# Altium PCB dislay.PcbDoc
Units mil, origin at the board's own origin, x right, y up, seen from the top; angles counter-clockwise.
Board outline 4150 x 1675 mil, 2 copper layers (Top Layer, Bottom Layer); 57 components, 72 nets, 201 pads, 2 vias.
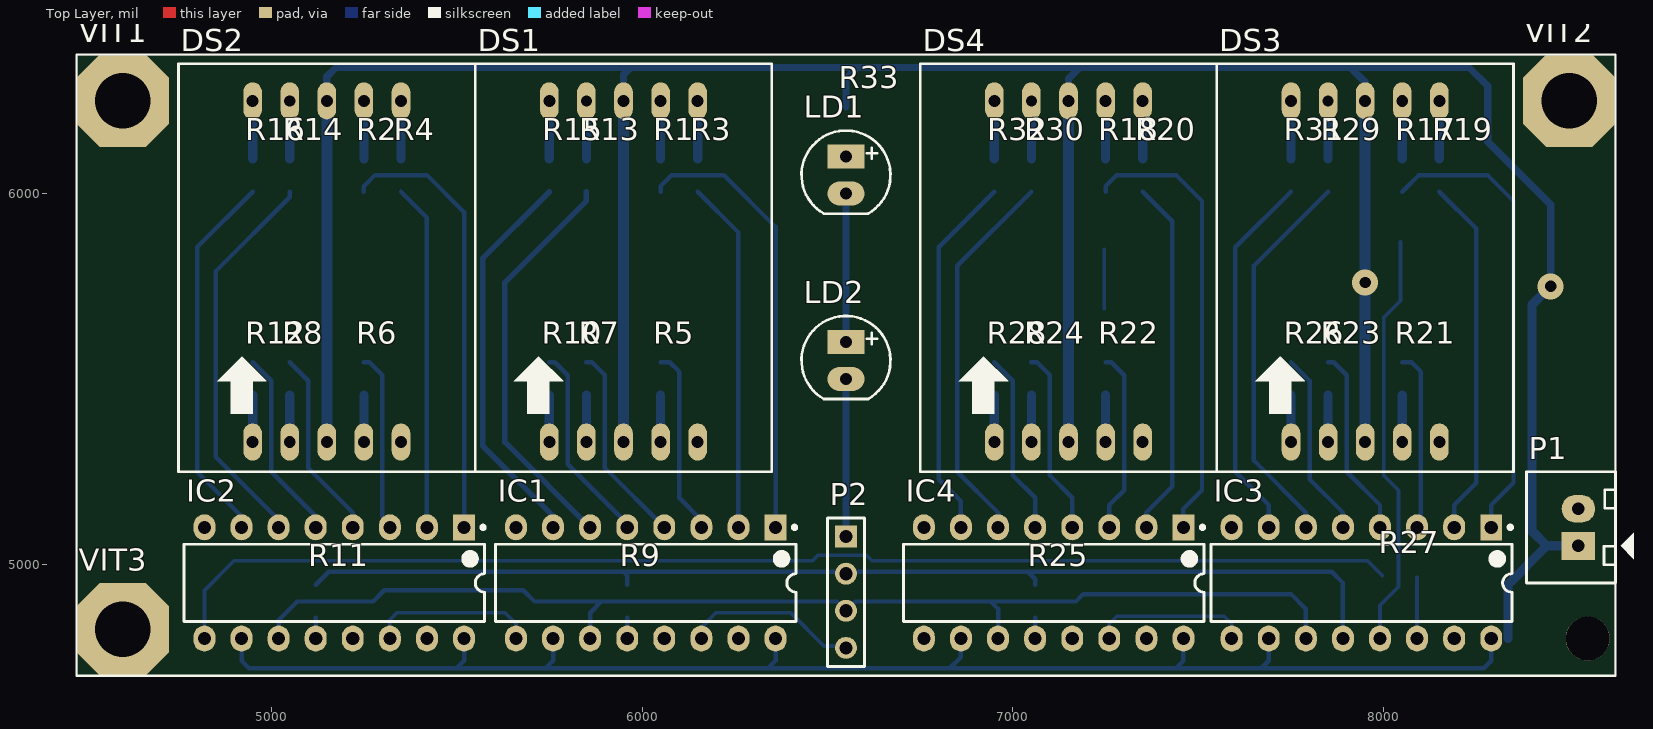
[diagram p0: Top Layer view]
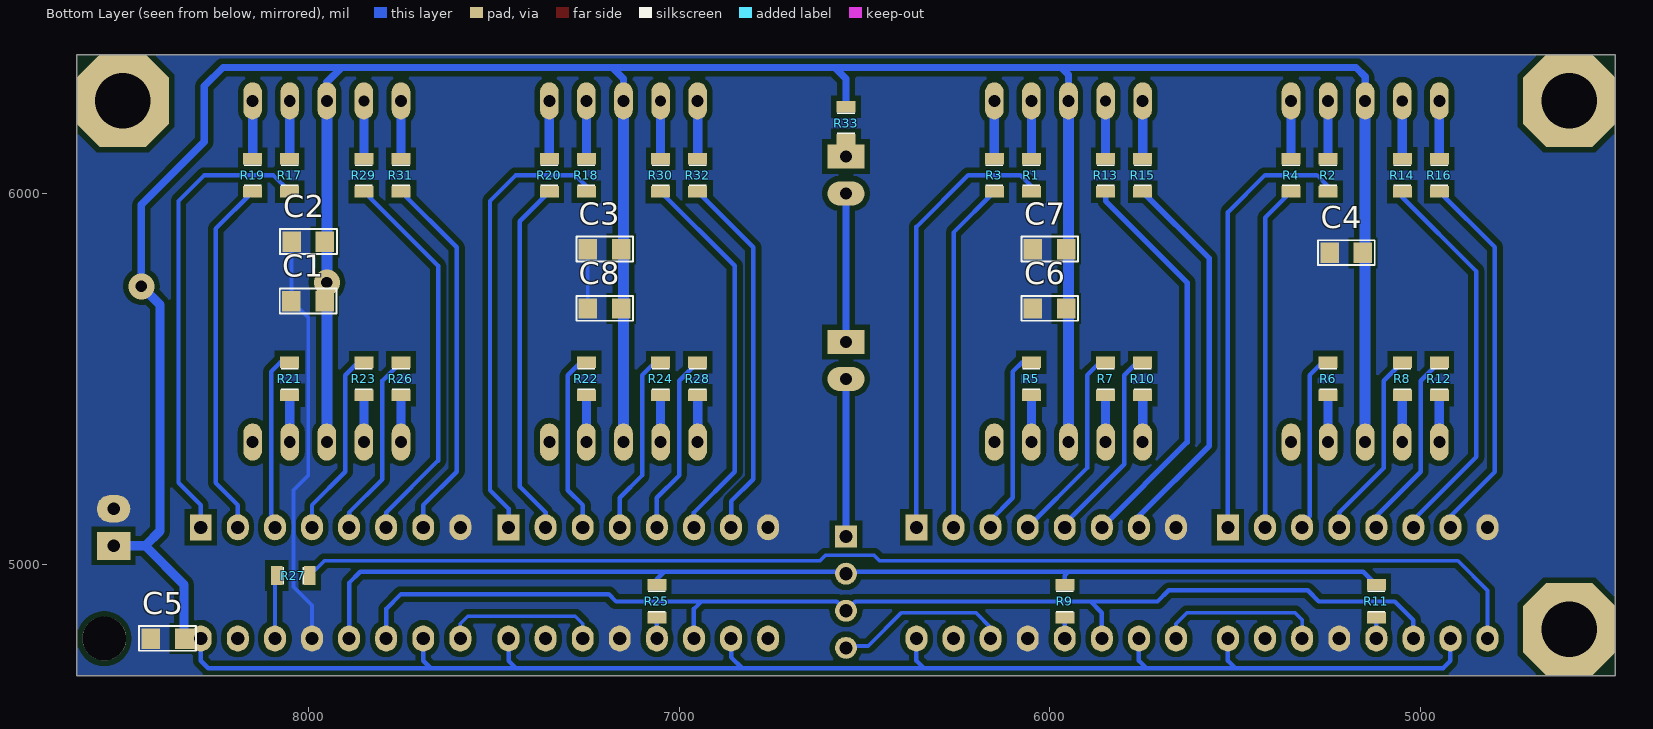
[diagram p1: Bottom Layer view, seen from below]
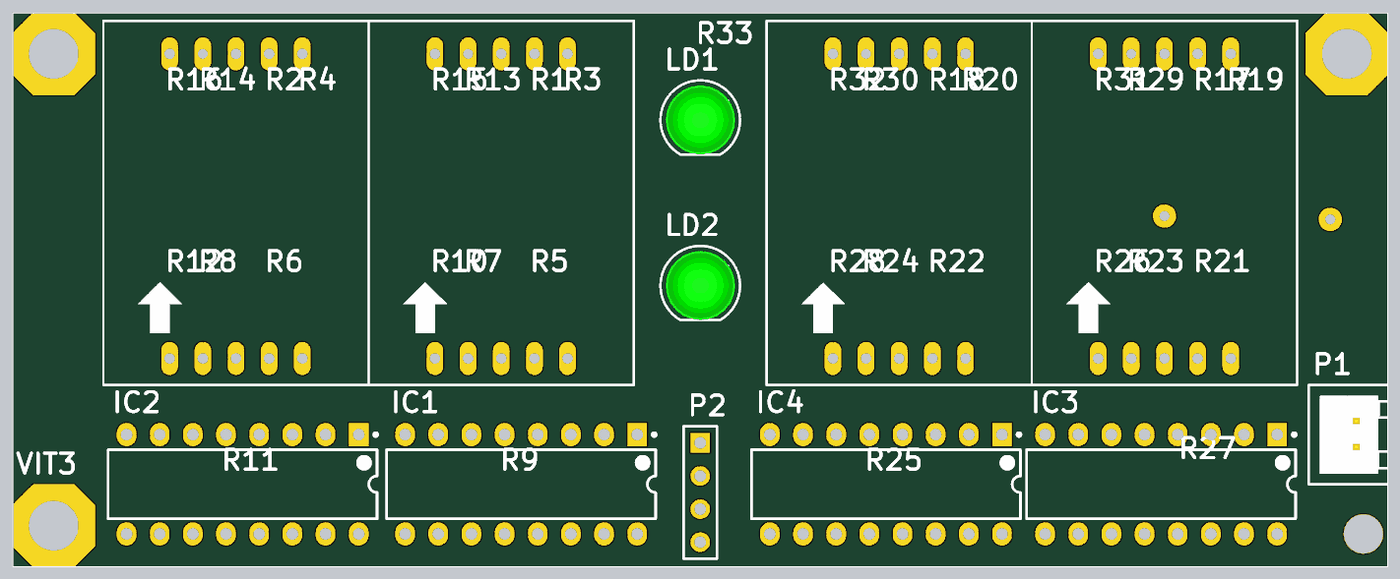
[diagram p2: 3D render of the assembled board from above, using the file's embedded part models]
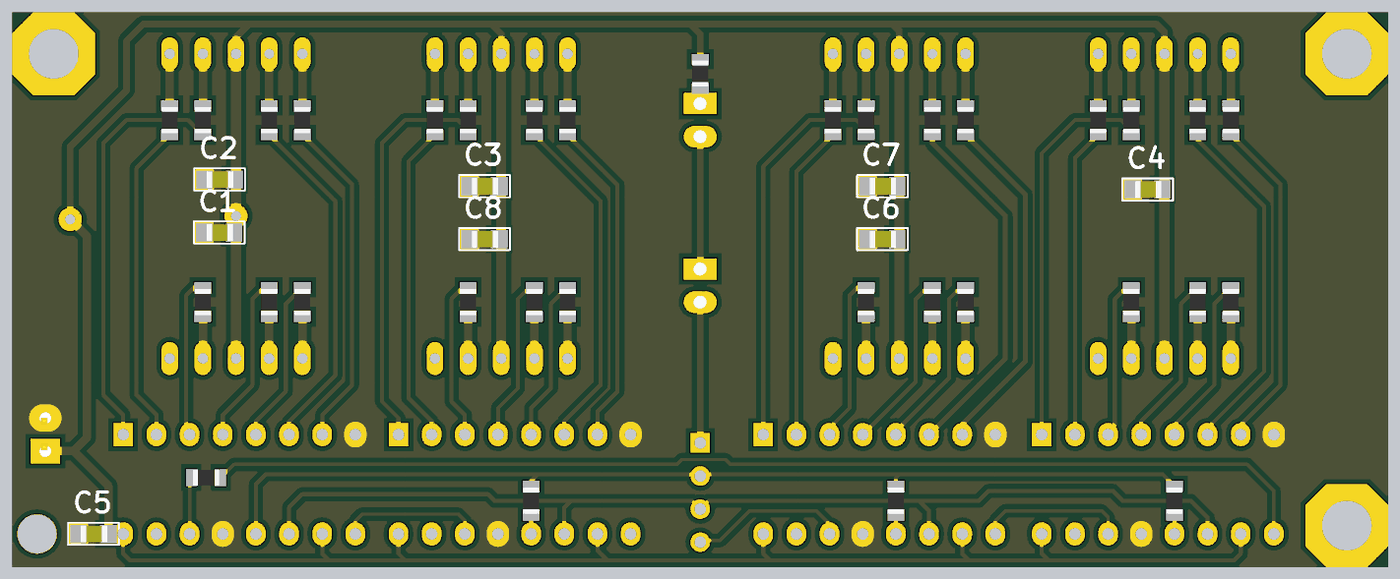
[diagram p3: 3D render of the assembled board from below, using the file's embedded part models]

## Layer stack, top to bottom
Top Layer: signal copper 1.4
Dielectric: dielectric 12.6, FR-4, Dk 4.8
Bottom Layer: signal copper 1.4

## Board outline
4475,6375 8625,6375 8625,4700 4475,4700

## Design rules (kind name [scope] priority, off if disabled: settings)
Clearance [All] p1: gap=15
PlaneConnect [All] p1: planeconnectstyle=Direct reliefexpansion=20 reliefentries=4 reliefconductorwidth=10 reliefairgap=10
PolygonConnect [All] p1: connectstyle=Direct reliefconductorwidth=10 reliefentries=4 polygonreliefangle="90 Angle"
RoomDefinition dislay [InComponentClass('dislay')] p1: confinementstyle=ConfineIn formatcopy=TRUE lockcomponents=FALSE outline 0,0 2000,0 2000,1000 0,1000
RoutingVias [All] p1: holewidth=28 width=50 viastyle="Through Hole" minholewidth=28 minwidth=50 maxholewidth=28 maxwidth=50
SilkscreenOverComponentPads [All] p1: minsilkscreentomaskgap=10
SolderMaskExpansion [All] p1: expansion=4
Width [All] p1: maxlimit=100 minlimit=10 preferedwidth=10
26 further rules are at their usual default settings.

## Components (designator, comment, footprint, x,y, rotation, side; value= is the part's Value field where it differs from the comment)
C1 "Cap 1206 BUT" SM-0805 8001,5710 r0 bottom
C2 "Cap 1206 BUT" SM-0805 8000,5870 r0 bottom
C3 "Cap 1206 BUT" SM-0805 7201,5850 r0 bottom
C4 "Cap 1206 BUT" SM-0805 5201,5840 r0 bottom
C5 "Cap 1206 BUT" SM-0805 8380,4800 r0 bottom
C6 "Cap 1206 BUT" SM-0805 6001,5690 r0 bottom
C7 "Cap 1206 BUT" SM-0805 6001,5850 r0 bottom
C8 "Cap 1206 BUT" SM-0805 7201,5690 r0 bottom
DS1 "7SEG-A" 7SEG_20X38 5750,4850 r0 top
DS2 "7SEG-A" 7SEG_20X38 4950,4850 r0 top
DS3 "7SEG-A" 7SEG_20X38 7750,4850 r0 top
DS4 "7SEG-A" 7SEG_20X38 6950,4850 r0 top
IC1 "74HC595" dip16 6360,5100 r270 top
IC2 "74HC595" diP16 5520,5100 r270 top
IC3 "74HC595" dip16 8290,5100 r270 top
IC4 "74HC595" dip16 7460,5100 r270 top
LD1 "LED" "LED-5 GRe" 6550,6100 r270 top
LD2 "LED" "LED-5 GRe" 6550,5600 r270 top
P1 "ENC2" con2 8525,5050 r90 top
P2 "ENC2" HDR1X4 6550,5075 r270 top
R1 "1K" "RES 0805 BUT" 6050,6050 r90 top
R2 "1K" "RES 0805 BUT" 5250,6050 r90 top
R3 "1K" "RES 0805 BUT" 6150,6050 r90 top
R4 "1K" "RES 0805 BUT" 5350,6050 r90 top
R5 "1K" "RES 0805 BUT" 6050,5500 r270 top
R6 "1K" "RES 0805 BUT" 5250,5500 r270 top
R7 "1K" "RES 0805 BUT" 5850,5500 r270 top
R8 "1K" "RES 0805 BUT" 5050,5500 r270 top
R9 "1" "RES 0805 BUT" 5960,4900 r270 top
R10 "1K" "RES 0805 BUT" 5750,5500 r270 top
R11 "1" "RES 0805 BUT" 5120,4900 r270 top
R12 "1K" "RES 0805 BUT" 4950,5500 r270 top
R13 "1K" "RES 0805 BUT" 5850,6050 r90 top
R14 "1K" "RES 0805 BUT" 5050,6050 r90 top
R15 "1K" "RES 0805 BUT" 5750,6050 r90 top
R16 "1K" "RES 0805 BUT" 4950,6050 r90 top
R17 "1K" "RES 0805 BUT" 8050,6050 r90 top
R18 "1K" "RES 0805 BUT" 7250,6050 r90 top
R19 "1K" "RES 0805 BUT" 8150,6050 r90 top
R20 "1K" "RES 0805 BUT" 7350,6050 r90 top
R21 "1K" "RES 0805 BUT" 8050,5500 r270 top
R22 "1K" "RES 0805 BUT" 7250,5500 r270 top
R23 "1K" "RES 0805 BUT" 7850,5500 r270 top
R24 "1K" "RES 0805 BUT" 7050,5500 r270 top
R25 "1" "RES 0805 BUT" 7060,4900 r270 top
R26 "1K" "RES 0805 BUT" 7750,5500 r270 top
R27 "1" "RES 0805 BUT" 8040,4970 r180 top
R28 "1K" "RES 0805 BUT" 6950,5500 r270 top
R29 "1K" "RES 0805 BUT" 7850,6050 r90 top
R30 "1K" "RES 0805 BUT" 7050,6050 r90 top
R31 "1K" "RES 0805 BUT" 7750,6050 r90 top
R32 "1K" "RES 0805 BUT" 6950,6050 r90 top
R33 "1K" "RES 0805 BUT" 6550,6190 r90 top
VIT1 "1" VIT 4600,6250 r0 top
VIT2 "1" VIT 8500,6250 r0 top
VIT3 "1" VIT 4600,4825 r0 top
VIT4 "1" VIT 139,851 r0 top

## Footprints (in the part's own frame and the unit in brackets; to place one, negate y for a bottom-side part, rotate by r counter-clockwise, add the part's x,y. Pads: shape width x height; smd on the part's side, far side on the other; paste and mask are expansions set on the pad)
7SEG_20X38 [mil] "DIP 10 Leads; Body 29 x 41 mm; Pitch 0.5 mm"
  oval 50x100 hole 32: 1(0,480) 2(100,480) 3(200,480) 4(300,480) 5(400,480) 6(400,1400) 7(300,1400) 8(200,1400) 10(0,1400)
  oval 50x100 hole 30: 9(100,1400)
  silkscreen extent -200,400 600,1500
con2 [mil] "CON2"
  rect 75x90 hole 34: 1(0,0)
  oval 75x90 hole 34: 2(100,0)
  silkscreen extent -100,-150 200,140, body extent -68,-70 168,107, height 236
dip16 [mm] "DIP16, 16 leads, row spacing 300mil, pitch 100mil"
  rect 1.778x1.5 hole 0.9: 1(0,0)
  oval 1.778x1.5 hole 0.9: 2(0,-2.54) 3(0,-5.08) 4(0,-7.62) 5(0,-10.16) 6(0,-12.7) 7(0,-15.24) 8(0,-17.78) 9(7.62,-17.78) 10(7.62,-15.24) 11(7.62,-12.7) 12(7.62,-10.16) 13(7.62,-7.62) 14(7.62,-5.08) 15(7.62,-2.54) 16(7.62,0)
  silkscreen extent -0.12,-19.19 6.46,1.43, body extent 0.21,-19.17 7.41,1.39, height 5.08
diP16 [mm] "DIP16, 16 leads, row spacing 300mil, pitch 100mil"
  rect 1.778x1.5 hole 0.9: 1(0,0)
  oval 1.778x1.5 hole 0.9: 2(0,-2.54) 3(0,-5.08) 4(0,-7.62) 5(0,-10.16) 6(0,-12.7) 7(0,-15.24) 8(0,-17.78) 9(7.62,-17.78) 10(7.62,-15.24) 11(7.62,-12.7) 12(7.62,-10.16) 13(7.62,-7.62) 14(7.62,-5.08) 15(7.62,-2.54) 16(7.62,0)
  silkscreen extent -0.12,-19.19 6.46,1.43, body extent 0.21,-19.17 7.41,1.39, height 5.08
HDR1X4 [mm] "Connector; Header; 4 Position"
  rect 1.5x1.5 hole 0.9: 1(0,0)
  round 1.5 hole 0.9: 2(2.54,0) 3(5.08,0) 4(7.62,0)
  silkscreen extent -1.27,-1.27 8.89,1.27
"LED-5 GRe" [mil] "LED 2 PIN, 5 ly , Only colour,pin to pin 100mil"
  rect 65x100 hole 32: 1(0,0)
  oval 65x100 hole 32: 2(100,0)
  silkscreen extent -70,-120 154,120, body extent -54,-104 154,105, height 337
"RES 0805 BUT" [mm]
  rect 0.8x1.3 smd far side: 1(1.118,0) 2(-1.143,0)
  body extent -1,-0.62 1,0.63
SM-0805 [mil] "Compoment SMD 80x50mil"
  rect 50x55 smd: 1(-45,0) 2(45,0)
  silkscreen extent -77,-34 76,33, body extent -42,-25 38,25, height 24
VIT [mil] "VIT"
  oct 250x250 hole 150: VIT1(0,0)

## Part data
C1 C2 C3 C4 C5 C6 C7 C8: "Capacitor"
DS1 DS2 DS3 DS4: library part LED7SEG-A, "14.2 mm General Purpose Blue 7-Segment Display: CA, RH DP, Gray Surface"
IC1 IC2 IC3 IC4: library part 74595, "8 Bit Serial input - Parallel Output"
LD1 LD2: "LED Single colour Green and Red"
P1: library part "Header 2", "Header, 2-Pin"
P2: library part "Header 4", "Header, 4-Pin"
R1 R2 R3 R4 R5 R6 R7 R8 R9 R10 R11 R12 R13 R14 R15 R16 R17 R18 R19 R20 R21 R22 R23 R24 R25 R26 R27 R28 R29 R30 R31 R32 R33: library part "RES 1206 BUT", "Resistor"
VIT1 VIT2 VIT3 VIT4: library part VIT, "Oc Vit"

## Free pads (board coordinates)
  round 118.11 hole 118.11: 0(8550,4800)

## Via types
v1: diameter 70.18, hole 30.56, Top Layer to Bottom Layer, 2 vias

## Nets (pads, with @x,y where several pads share a name; then routed paths per layer and width w, separated by ;. In a path a pad name is that pad's centre, name@x,y a point inside that pad or via, vN(x,y) a via of type N, cw(c..) or ccw(c..) an arc to the next point about the centre after c; other vN are vias at no path point)
595_LAT: IC3.12 P2.2 R9.2 R11.2 R25.2 | length 3029.4
  Bottom Layer w12: R11.2 5155,4980 5950,4980 ; R9.2 5960,4970 5950,4980 ; R25.2 7060,4960 7040,4980 ; IC3.12 7890,4950 7860,4980 7040,4980 ; 5950,4980 7040,4980
595_SCK: IC1.11 IC2.11 IC3.11 IC4.11 P2.3 | length 3221.8
  Bottom Layer w12: IC2.11 5020,4850 5070,4900 5275,4900 5305,4930 5680,4930 5710,4900 5890,4900 ; IC1.11@5860,4790 5860,4870 5890,4900 ; IC4.11 6960,4880 6940,4900 ; IC3.11 7790,4880 7750,4920 7190,4920 7170,4900 6940,4900 ; 5890,4900 6525,4900 P2.3 6575,4900 6940,4900
DATA: IC1.14 P2.4 | length 478.8
  Bottom Layer w10: IC1.14@6160,4790 6160,4830 6200,4870 6400,4870 6490,4780 P2.4@6545,4780
GND: C1.2 C2.2 C3.2 C4.2 C5.2 C6.2 C7.2 C8.2 IC1.8 IC1.13 IC2.8 IC2.13 IC3.8 IC3.13 IC4.8 IC4.13 P1.2 | length 1285.9
  Bottom Layer w10: C8.2 C3.2 ; IC3.13 7990,4890 8040,4940 8040,5200 8000,5240 8000,5666 8045,5711 C2.2
LED: LD2.2 P2.1 | length 425
  Bottom Layer w20: P2.1 LD2.2
NetDS1_1: DS1.1 R10.1 | length 126
  Bottom Layer w25: DS1.1 R10.1
NetDS1_2: DS1.2 R7.1 | length 126
  Bottom Layer w25: DS1.2 R7.1
NetDS1_4: DS1.4 R5.1 | length 126
  Bottom Layer w25: DS1.4 R5.1
NetDS1_6: DS1.6 R3.1 | length 156
  Bottom Layer w25: R3.1 DS1.6
NetDS1_7: DS1.7 R1.1 | length 156
  Bottom Layer w25: R1.1 DS1.7
NetDS1_9: DS1.9 R13.1 | length 156
  Bottom Layer w25: R13.1 DS1.9
NetDS1_10: DS1.10 R15.1 | length 156
  Bottom Layer w25: R15.1 DS1.10
NetDS2_1: DS2.1 R12.1 | length 126
  Bottom Layer w25: DS2.1 R12.1
NetDS2_2: DS2.2 R8.1 | length 126
  Bottom Layer w25: DS2.2 R8.1
NetDS2_4: DS2.4 R6.1 | length 126
  Bottom Layer w25: DS2.4 R6.1
NetDS2_6: DS2.6 R4.1 | length 156
  Bottom Layer w25: R4.1 DS2.6
NetDS2_7: DS2.7 R2.1 | length 156
  Bottom Layer w25: R2.1 DS2.7
NetDS2_9: DS2.9 R14.1 | length 156
  Bottom Layer w25: R14.1 DS2.9
NetDS2_10: DS2.10 R16.1 | length 156
  Bottom Layer w25: R16.1 DS2.10
NetDS3_1: DS3.1 R26.1 | length 126
  Bottom Layer w25: DS3.1 R26.1
NetDS3_2: DS3.2 R23.1 | length 126
  Bottom Layer w25: DS3.2 R23.1
NetDS3_4: DS3.4 R21.1 | length 126
  Bottom Layer w25: DS3.4 R21.1
NetDS3_6: DS3.6 R19.1 | length 156
  Bottom Layer w25: R19.1 DS3.6
NetDS3_7: DS3.7 R17.1 | length 156
  Bottom Layer w25: R17.1 DS3.7
NetDS3_9: DS3.9 R29.1 | length 156
  Bottom Layer w25: R29.1 DS3.9
NetDS3_10: DS3.10 R31.1 | length 156
  Bottom Layer w25: R31.1 DS3.10
NetDS4_1: DS4.1 R28.1 | length 126
  Bottom Layer w25: DS4.1 R28.1
NetDS4_2: DS4.2 R24.1 | length 126
  Bottom Layer w25: DS4.2 R24.1
NetDS4_4: DS4.4 R22.1 | length 126
  Bottom Layer w25: DS4.4 R22.1
NetDS4_6: DS4.6 R20.1 | length 156
  Bottom Layer w25: R20.1 DS4.6
NetDS4_7: DS4.7 R18.1 | length 156
  Bottom Layer w25: R18.1 DS4.7
NetDS4_9: DS4.9 R30.1 | length 156
  Bottom Layer w25: R30.1 DS4.9
NetDS4_10: DS4.10 R32.1 | length 156
  Bottom Layer w25: R32.1 DS4.10
NetIC1_1: IC1.1 R1.2 | length 1215.4
  Bottom Layer w12: R1.2 6050,6020 6080,6050 6220,6050 6360,5910 IC1.1@6360,5090
NetIC1_2: IC1.2 R3.2 | length 950.6
  Bottom Layer w12: R3.2 6260,5895 IC1.2
NetIC1_3: IC1.3 R5.2 | length 515.2
  Bottom Layer w12: R5.2 6075,5545 6100,5520 6100,5180 6160,5120 IC1.3@6160,5090
NetIC1_4: IC1.4 R7.2 | length 550.8
  Bottom Layer w12: R7.2 5865,5545 5900,5510 5900,5260 IC1.4 IC1.4@6060,5090
NetIC1_5: IC1.5 R10.2 | length 540.8
  Bottom Layer w12: R10.2 5765,5545 5800,5510 5800,5270 5960,5110 IC1.5
NetIC1_6: IC1.6 R13.2 | length 1091.4
  Bottom Layer w15: R13.2 5850,5980 5630,5760 5630,5330 IC1.6
NetIC1_7: IC1.7 R15.2 | length 1068.3
  Bottom Layer w15: R15.2 5570,5825 5570,5320 5760,5130 IC1.7@5760,5090
NetIC1_12: IC1.12 R9.1 | length 66
  Bottom Layer w12: IC1.12@5960,4790 R9.1
NetIC2_1: IC2.1 R2.2 | length 1188.8
  Bottom Layer w12: R2.2 5250,6020 5280,6050 5420,6050 5520,5950 IC2.1
NetIC2_2: IC2.2 R4.2 | length 934
  Bottom Layer w12: R4.2 5420,5935 IC2.2
NetIC2_3: IC2.3 R6.2 | length 482.8
  Bottom Layer w12: R6.2 5265,5545 5300,5510 5300,5130 5320,5110 IC2.3
NetIC2_4: IC2.4 R8.2 | length 515.4
  Bottom Layer w12: R8.2 5100,5495 5100,5260 5220,5140 IC2.4
NetIC2_5: IC2.5 R12.2 | length 515.4
  Bottom Layer w12: R12.2 5000,5495 5000,5250 5120,5130 IC2.5
NetIC2_6: IC2.6 R14.2 | length 1058.3
  Bottom Layer w12: IC2.6 5020,5120 4850,5290 4850,5790 5050,5990 R14.2
NetIC2_7: IC2.7 R16.2 | length 1016.8
  Bottom Layer w12: IC2.7 4920,5130 4800,5250 4800,5855 R16.2
NetIC2_9: IC2.9 R27.1 | length 3367.7
  Bottom Layer w10: IC2.9 4820,4930 4900,5010 6460,5010 6474.53,5024.53 6605.47,5024.53 6620,5010 7956,5010 R27.1
NetIC2_12: IC2.12 R11.1 | length 63.1
  Bottom Layer w12: R11.1 IC2.12 IC2.12@5125,4805
NetIC3_1: IC3.1 R17.2 | length 1252.5
  Bottom Layer w12: R17.2 8095,6050 8280,6050 8350,5980 8350,5220 8290,5160 IC3.1
NetIC3_2: IC3.2 R19.2 | length 971.3
  Bottom Layer w12: R19.2 8250,5905 8250,5220 8190,5160 IC3.2
NetIC3_3: IC3.3 R21.2 | length 494.5
  Bottom Layer w12: R21.2 8075,5545 8100,5520 8100,5110 IC3.3 IC3.3@8090,5090
NetIC3_4: IC3.4 R23.2 | length 511.8
  Bottom Layer w12: R23.2 7865,5545 7900,5510 7900,5250 7990,5160 IC3.4
NetIC3_5: IC3.5 R26.2 | length 503
  Bottom Layer w12: R26.2 7800,5495 7800,5230 7890,5140 IC3.5
NetIC3_6: IC3.6 R29.2 | length 1055.8
  Bottom Layer w12: IC3.6@7790,5090 7790,5140 7650,5280 7650,5805 R29.2
NetIC3_7: IC3.7 R31.2 | length 1004.4
  Bottom Layer w12: IC3.7 7690,5160 7600,5250 7600,5855 R31.2
NetIC4_1: IC4.1 R18.2 | length 1217.1
  Bottom Layer w12: R18.2 7250,6020 7280,6050 7440,6050 7510,5980 7510,5200 7460,5150 IC4.1
NetIC4_2: IC4.2 R20.2 | length 967.1
  Bottom Layer w12: R20.2 7430,5925 7430,5210 7360,5140 IC4.2
NetIC4_3: IC4.3 R22.2 | length 491.1
  Bottom Layer w12: R22.2 7265,5545 7300,5510 7300,5200 7260,5160 IC4.3
NetIC4_4: IC4.4 R24.2 | length 499.4
  Bottom Layer w12: R24.2 7065,5545 7100,5510 7100,5240 7160,5180 IC4.4
NetIC4_5: IC4.5 R28.2 | length 500.6
  Bottom Layer w12: R28.2 7000,5495 7000,5240 7060,5180 IC4.5@7060,5090
NetIC4_6: IC4.6 R30.2 | length 1033.4
  Bottom Layer w12: IC4.6 6960,5140 6850,5250 6850,5805 R30.2
NetIC4_7: IC4.7 R32.2 | length 992
  Bottom Layer w12: IC4.7 6860,5170 6800,5230 6800,5855 R32.2
NetIC4_12: IC4.12 R25.1 | length 56
  Bottom Layer w12: IC4.12 R25.1
NetLD1_1: LD1.1 R33.2
NetLD1_2: LD1.2 LD2.1 | length 400
  Bottom Layer w20: LD2.1 LD1.2
S1: IC1.9 IC2.14 | length 460.7
  Bottom Layer w10: IC2.14 5320,4850 5340,4870 5630,4870 5660,4840 IC1.9@5660,4790
S2: IC3.14 R27.2 | length 165
  Bottom Layer w10: IC3.14 R27.2@8090,4965
S3: IC3.9 IC4.14 | length 426.6
  Bottom Layer w10: IC4.14 7260,4840 7280,4860 7570,4860 7590,4840 IC3.9
S4: IC4.9
VCC: C1.1 C2.1 C3.1 C4.1 C5.1 C6.1 C7.1 C8.1 DS1.3 DS1.8 DS2.3 DS2.8 DS3.3 DS3.8 DS4.3 DS4.8 IC1.10 IC1.16 IC2.10 IC2.16 IC3.10 IC3.16 IC4.10 IC4.16 P1.1 R33.1 | length 13092.7
  Bottom Layer w12: IC2.10 4920,4740 4940,4720 5500,4720 ; IC2.16 5520,4740 5500,4720 ; IC1.10@5760,4790 5760,4740 5740,4720 ; 6350,4730 6340,4720 ; IC1.16@6360,4790 6360,4740 6340,4720 ; IC4.10 6860,4750 6830,4720 ; IC4.16 7460,4740 7440,4720 ; IC3.10 7690,4740 7670,4720 ; IC3.16 8290,4740 8270,4720 7670,4720 ; 5500,4720 5740,4720 ; 5740,4720 6340,4720 ; 6340,4720 6830,4720 ; 6830,4720 7440,4720 ; 7440,4720 7670,4720
  Bottom Layer w20: DS2.8 5150,6315.35 5174.65,6340 5970,6340 ; DS1.8 5950,6320 5970,6340 ; R33.1 6550,6310 6580,6340 ; DS4.8 7150,6310 7180,6340 ; DS3.8 7950,6300 7910,6340 ; v1(8450,5750) 8450,5970 8280,6140 8280,6290 8230,6340 7910,6340 ; 5970,6340 6580,6340 ; 6580,6340 7180,6340 ; 7180,6340 7910,6340
  Bottom Layer w25: C5.1 8335,4945 8440,5050 ; v1(8450,5750) 8400,5700 8400,5090 8440,5050 ; P1.1 8440,5050
  Bottom Layer w30: DS2.3 DS2.8 ; DS1.3 DS1.8 ; DS4.3 DS4.8 ; DS3.3 DS3.8
  other v1: 7950,5760
pads on no net: DS1.5 DS2.5 DS3.5 DS4.5 IC1.15 IC2.15 IC3.15 IC4.15 VIT1.VIT1 VIT2.VIT1 VIT3.VIT1 VIT4.VIT1

## Polygon pours and split planes (outlines as drawn)
GND on Bottom Layer "Bottom Layer-No Net" (solid, pour order 4): 8625,4700 8625,6375 4475,6375 4475,4700

## Silkscreen, mask and mechanical layers (free items; w line width, h text height)
Top Overlay:
  the board outline again, w6